# Altium PCB PCB1.PcbDoc
Units mil, origin at the board's own origin, x right, y up, seen from the top; angles counter-clockwise.
Board outline 2925 x 2000 mil, 2 copper layers (Top Layer, Bottom Layer); 11 components, 7 nets, 36 pads, 0 vias.
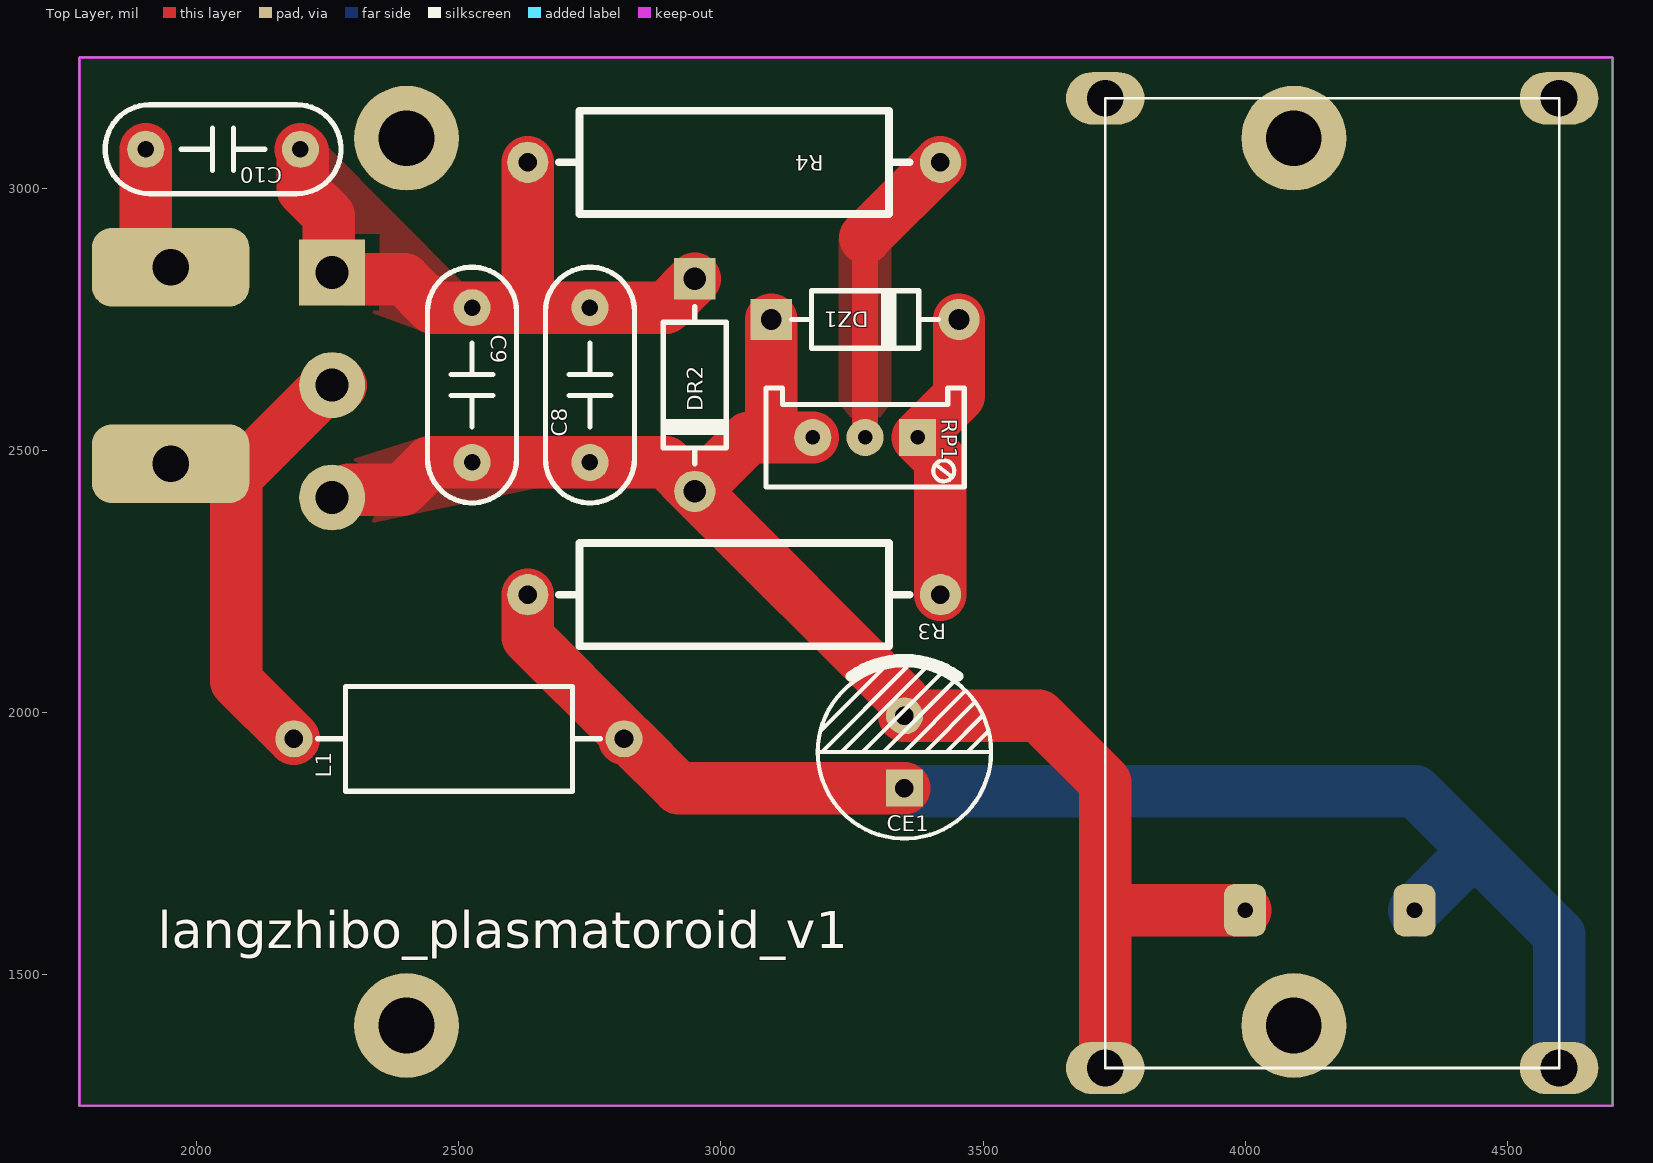
[diagram p0: Top Layer view]
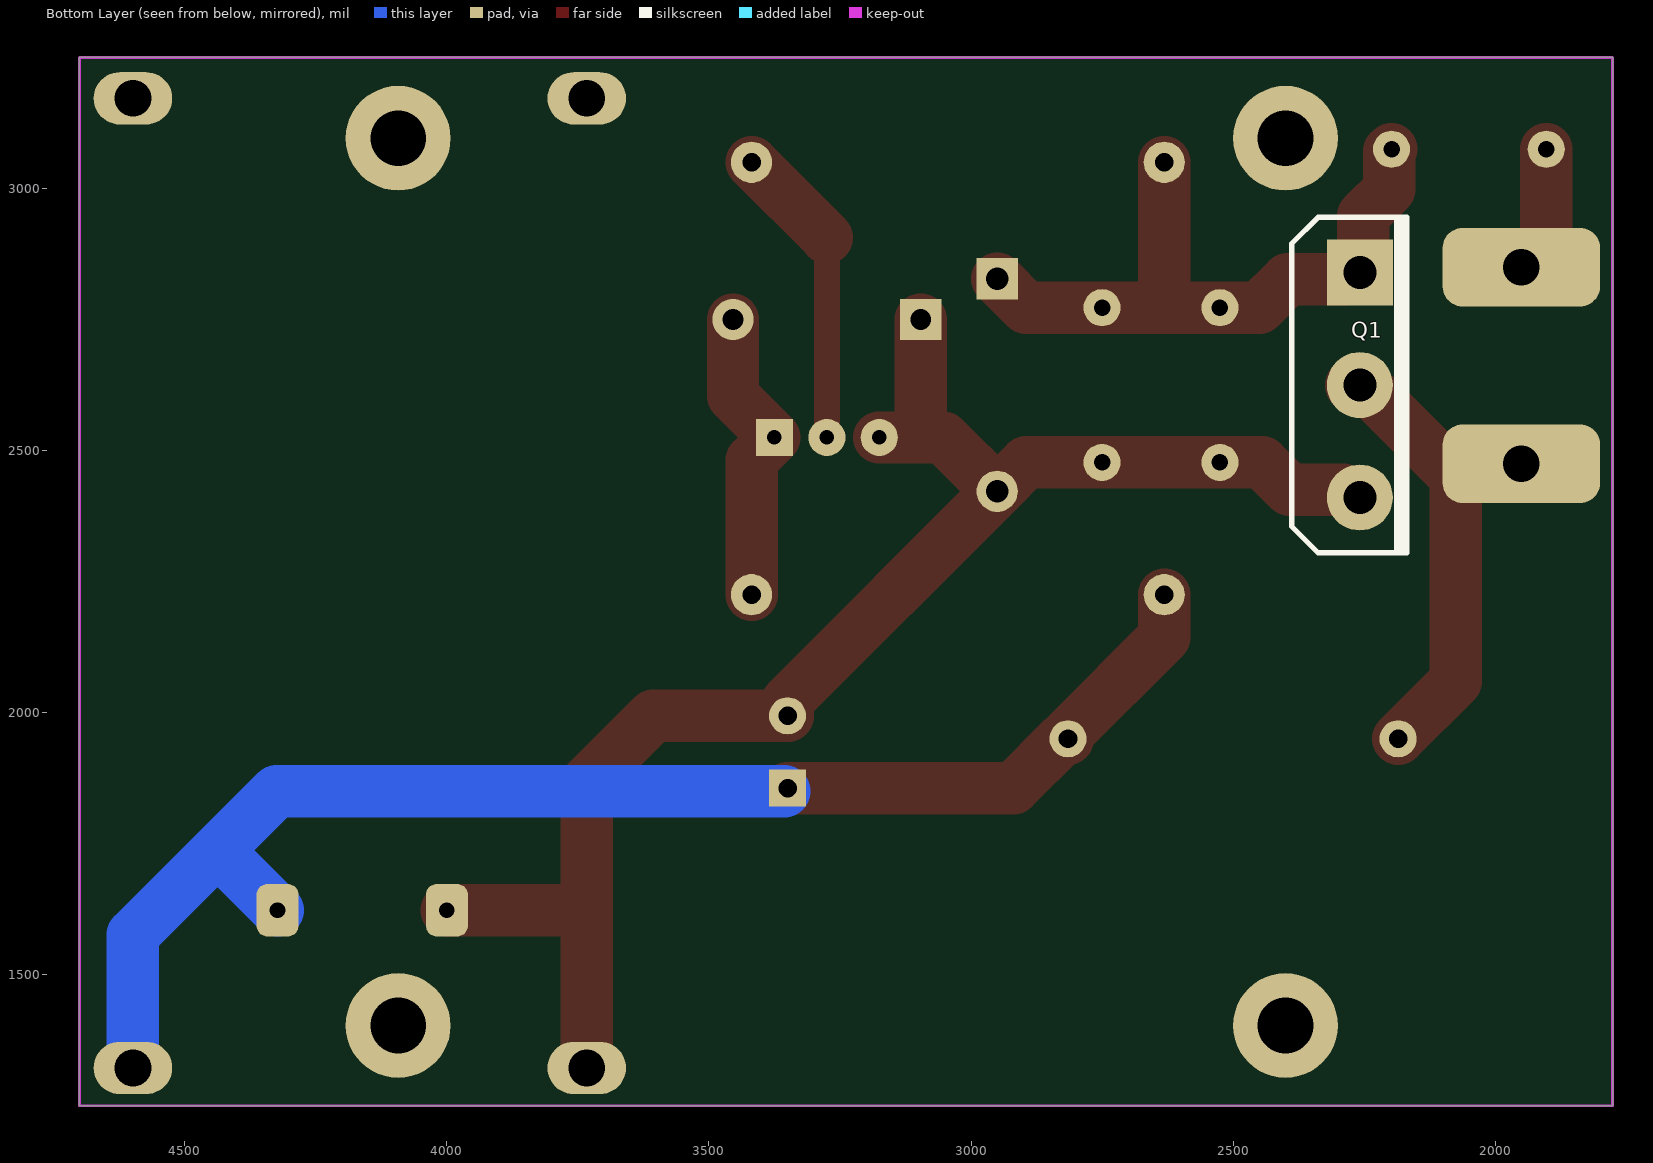
[diagram p1: Bottom Layer view, seen from below]
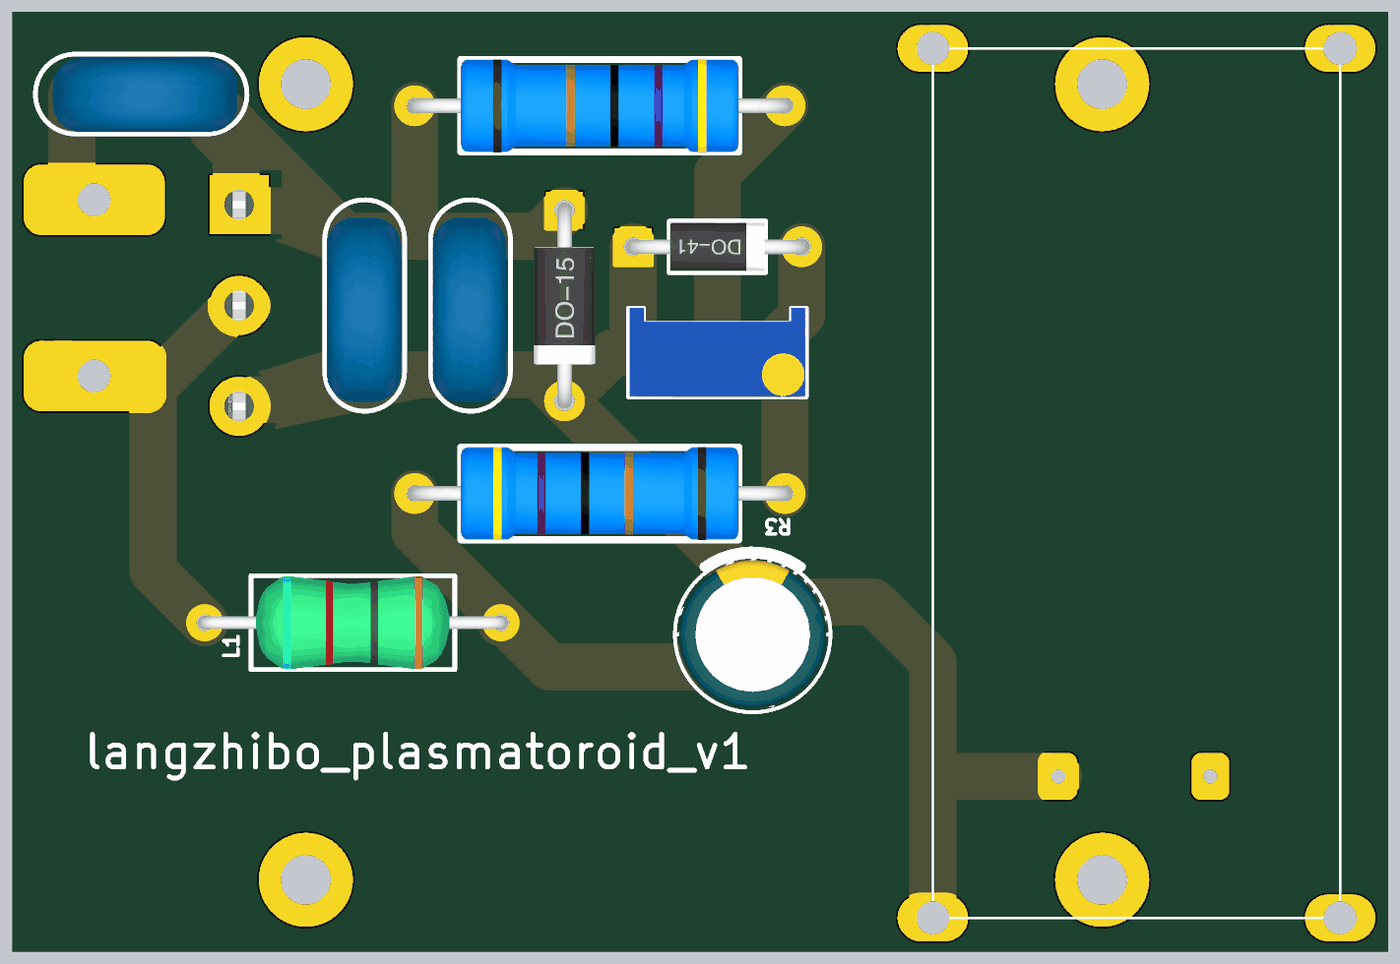
[diagram p2: 3D render of the assembled board from above, using the file's embedded part models]

## Layer stack, top to bottom
Top Solder: solder mask 0.4, Solder Resist, Dk 3.5
Top Layer: signal copper 1.4
Dielectric 1: dielectric 12.6, FR-4, Dk 4.8
Bottom Layer: signal copper 1.4
Bottom Solder: solder mask 0.4, Solder Resist, Dk 3.5

## Board outline
1776,1250 1776,3250 4701,3250 4701,1250

## Design rules (kind name [scope] priority, off if disabled: settings)
Clearance [All] p1: gap=10 ignorepadtopadclearanceinfootprint=FALSE except(0: Arc-Hole Track-Hole SMDPad-Hole THPad-Hole Via-Hole Fill-Hole Poly-Hole Region-Hole Text-Hole)
PolygonConnect [All] p1: connectstyle=Relief reliefconductorwidth=10 reliefentries=4 polygonreliefangle="90 Angle" airgapwidth=10
RoutingVias [All] p1: holewidth=28 width=50 viastyle="Through Hole" minholewidth=28 minwidth=50 maxholewidth=28 maxwidth=50
SolderMaskExpansion [All] p1: expansion=4 istentingtop=FALSE
Width [All] p1: maxlimit=100 minlimit=10 preferedwidth=10 minimp=50.000000 maximp=50.000000 favimp=50.000000
30 further rules are at their usual default settings.

## Components (designator, comment, footprint, x,y, rotation, side; value= is the part's Value field where it differs from the comment)
C8 "4.7nF/1KV" "CY 7.5*10*4" 2750,2625 r90 top
C9 "4.7nF/1KV" "CY 7.5*10*4" 2525,2625 r90 top
C10 "120pF/1KV" "CY 7.5*10*4" 2050,3075 r180 top
CE1 "30uF/50V" CE-3.5*8 3350,1925 r90 top
DR2 "P6KE18CA" DO-15 2950,2625 r270 top
DZ1 "1N4743" DO-41 3275,2750 r0 top
L1 "10uH" AL0510 2500,1950 r0 top
Q1 "IRFP260" TO247A 2258.11,2625 r270 bottom
R3 "1K" "RS 2W" 3025,2225 r0 top
R4 "10K" "RS 2W" 3025,3050 r180 top
RP1 "10K" 3296W 3275,2525 r180 top

## Footprints (in the part's own frame and the unit in brackets; to place one, negate y for a bottom-side part, rotate by r counter-clockwise, add the part's x,y. Pads: shape width x height; smd on the part's side, far side on the other; paste and mask are expansions set on the pad)
3296W [mm] "Precise Multi-Winding Adjustable Resistor             ÁªÏµÂô¼Ò Ãâ·Ñ²éÕÒ·â×°"
  rect 1.8x1.8 hole 0.7: 1(-2.54,0)
  round 1.8 hole 0.7: 2(0,0) 3(2.54,0)
  silkscreen extent -4.8,-2.4 4.8,2.4, body extent -4.75,-2.4 4.75,2.4, height 2.9
AL0510 [mm] "16*5*10.5mm£¨½Å¾à£¬Ö±¾¶£¬³¤¶È£©           ÁªÏµÂô¼Ò Ãâ·Ñ²éÕÒ·â×°"
  round 1.8 hole 0.9: 1(-8,0) 2(8,0)
  silkscreen extent -6.86,-2.54 6.86,2.54, body extent -8.35,-2.51 8.35,2.51, height 5.06
CE-3.5*8 [mm] "½Å¾à3.5mmÖ±¾¶8mm¸ß¶È11.5mm        ÁªÏµÂô¼Ò Ãâ·ÑÈË¹¤²éÕÒ·â×°"
  rect 1.8x1.8 hole 0.9: 1(-1.75,0)
  round 1.8 hole 0.9: 2(1.75,0)
  silkscreen extent -4.2,-4.2 4.5,4.2, body extent -4,-4 4.01,4, height 11.64
"CY 7.5*10*4" [mm] "½Å¾à7.5mm£¬Ö±¾¶10mm£¬ºñ4mm     ÁªÏµÂô¼Ò Ãâ·ÑÈË¹¤²éÕÒ·â×°"
  round 1.8 hole 0.8: 1(-3.75,0) 2(3.75,0)
  silkscreen extent -5.71,-2.16 5.71,2.16, body extent -5.23,-1.95 4.78,2.05, height 10.25
DO-15 [mm] "3.3*10.3mm(Ö±¾¶£¬½Å¾à£©"
  rect 2x2 hole 1.1: 1(-5.15,0)
  round 2 hole 1.1: 2(5.15,0)
  silkscreen extent -3.81,-1.52 3.81,1.52, body extent -5.55,-1.65 5.55,1.65, height 3.35
DO-41 [mm] "2.6*9.1mm(Ö±¾¶£¬½Å¾à£©"
  rect 2x2 hole 1: 1(-4.55,0)
  round 2 hole 1: 2(4.55,0)
  silkscreen extent -3.56,-1.4 3.56,1.4, body extent -4.95,-1.3 4.95,1.3, height 2.6
"RS 2W" [mm] "Ö±²åÉ«»·µç×è£¬½Å¾à20mm£¬Ö±¾¶5mm"
  round 2 hole 0.9: 1(10,0) 2(-10,0)
  silkscreen extent -8.5,-2.5 8.5,2.5, body extent -10.4,-2.51 10.4,2.51, height 5.11
TO247A [mm] "247£¬3½ÅÁ¢Ê½·â×°                ÁªÏµÂô¼Ò Ãâ·Ñ²éÕÒ·â×°"
  rect 3.2x3.2 hole 1.6: 1(-5.45,0)
  round 3.2 hole 1.6: 2(0,0) 3(5.45,0)
  silkscreen extent -8.13,-3.3 8.13,2.29, body extent -7.75,-3 7.75,2, height 24

## Part data
C8 C9 C10: library part CY, "安规Y电容", BOM名称=高压陶瓷电容，Y电容, 当前库版本V2024.2.3 @淘宝卖家:黄晶宝石=最新版本发布https://item.taobao.com/item.htm?id=566775463719
CE1: library part CE, "直插电解电容", BOM名称=直插电解电容, 联系下单店铺卖家 免费帮你查找封装="联系下单店铺卖家 免费技术指导"
DR2: library part DR, "瞬态电压抑制二极管", BOM名称=瞬态电压抑制二极管, 当前库版本V2024.2.3 @淘宝卖家:黄晶宝石=最新版本发布https://item.taobao.com/item.htm?id=566775463719
DZ1: library part 1N4742, "12V/1W稳压管", BOM名称=12V/1W稳压管, 当前库版本V2024.2.3 @淘宝卖家:黄晶宝石=最新版本发布https://item.taobao.com/item.htm?id=566775463719
L1: library part L-AL, "色环电感", BOM名称=色环电感, 当前库版本V2024.2.3 @淘宝卖家:黄晶宝石=最新版本发布https://item.taobao.com/item.htm?id=566775463719
Q1: library part IRFP250, "N沟道 200V/30A", BOM名称=功率型N沟场效应管, 当前库版本V2024.2.3 @淘宝卖家:黄晶宝石=最新版本发布https://item.taobao.com/item.htm?id=566775463719, 联系下单店铺卖家 免费帮你查找封装="联系下单店铺卖家 免费技术支持"
R3 R4: library part R-DIP, "直插色环电阻", BOM名称=色环电阻, 联系下单店铺卖家 免费帮你查找封装="联系下单店铺卖家 免费技术指导"
RP1: library part RP, "单联电位器", BOM名称=插件电位器, 联系下单店铺卖家 免费帮你查找封装="联系下单店铺卖家 免费技术指导"

## Free pads (board coordinates)
  round 200 hole 106: 43(4093,3096) 44(4093,1403) 45(2400,1403) 46(2400,3096)
  oval 150x100 hole 70: 47(4599,3172) 48(3733,3172) 49(3733,1322) 50(4599,1322)
  rrect50% 80x100 hole 30: 51(4000,1623) 52(4323,1623)
  rrect50% 300x150 hole 70: 53(1950,2850) 54(1950,2475)

## Nets (pads, with @x,y where several pads share a name; then routed paths per layer and width w, separated by ;. In a path a pad name is that pad's centre, name@x,y a point inside that pad or via, vN(x,y) a via of type N, cw(c..) or ccw(c..) an arc to the next point about the centre after c; other vN are vias at no path point)
NetC8_1: C8.1 C9.1 CE1.2 DR2.2 DZ1.1 pad.49 pad.51 Q1.3 RP1.3 | length 3063.4
  Top Layer w100: Q1.3@2275,2410.43 2289.54,2424.97 2391.96,2424.97 2444.35,2477.36 C9.1 C8.1 2894.88,2477.36 DR2.2 ; DZ1.1 3095.87,2531.99 3088.88,2525 ; RP1.3 3088.88,2525 ; pad.49 3733,1625 ; pad.51 3735,1623 3733,1625 ; DR2.2 3350,2022.24 CE1.2 3606.1,1993.9 3733,1867 3733,1625 ; DR2.2 3052.76,2525 3088.88,2525
NetC8_2: C8.2 C9.2 C10.1 DR2.1 Q1.1 R4.1 | length 1278.1
  Top Layer w100: C10.1 2201.63,3071.01 2201.63,2998.37 2251.73,2948.27 2251.73,2862.84 2275,2839.57 2287.99,2826.57 2396.06,2826.57 2450,2772.64 C9.2 2650,2772.64 ; R4.1 2631.3,2796.99 2650,2778.28 2650,2772.64 ; DR2.1 2894.88,2772.64 C8.2 2650,2772.64
NetCE1_1: CE1.1 L1.2 pad.50 pad.52 R3.2 | length 2697.3
  Top Layer w100: R3.2 2631.3,2143.7 2814.96,1960.04 L1.2 2825,1950 2918.9,1856.1 CE1.1
  Bottom Layer w100: CE1.1@3356.1,1850 4325,1850 4437.5,1737.5 ; pad.52 4437.5,1737.5 ; pad.50 4599,1576 4437.5,1737.5
NetDZ1_2: DZ1.2 R3.1 RP1.1 | length 575.9
  Top Layer w100: R3.1 3418.7,2481.3 RP1.1 3454.13,2604.13 DZ1.2
NetR4_2: R4.2 RP1.2 | length 584.5
  Top Layer w50: RP1.2 3275,2906.3
  Top Layer w100: 3275,2906.3 R4.2
out1: C10.2 pad.53 | length 258
  Top Layer w100: C10.2 1902.36,2875 1927.36,2850 pad.53
out2: L1.1 pad.54 Q1.2 | length 945.5
  Top Layer w100: pad.54 pad.54@2075,2450 ; L1.1 2075,2060.04 pad.54@2075,2450 ; Q1.2@2275,2625 2270.03,2620.03 2245.03,2620.03 pad.54@2075,2450

## Polygon pours and split planes (outlines as drawn)
NetC8_2 on Top Layer "Top Layer-No Net" (solid, remove dead copper, pour order 6): 2241.63,3088.37 2505,2822 2505,2725 2504,2724 2440,2724 2288,2779 2211,2834
NetC8_1 on Top Layer "Top Layer-No Net" (solid, remove dead copper, pour order 3): 2429,2525 2436,2525 2655.07,2429.67 2445,2385 2271,2348 2254,2470
NetR4_2 on Top Layer "Top Layer-No Net" (solid, remove dead copper, pour order 1): 3275.78,2525.78 3225,2592 3225,2906 3325,2906 3325,2592

## Keep-outs
Keep-Out Layer:
  the board outline again, w5

## Silkscreen, mask and mechanical layers (free items; w line width, h text height)
Top Overlay:
  lines w5: 3733,1322 3733,3172 4599,3172 4599,1322 3733,1322
  text "langzhibo_plasmatoroid_v1" at 1925,1550 h70